# EAGLE board x (EAGLE 5.11)
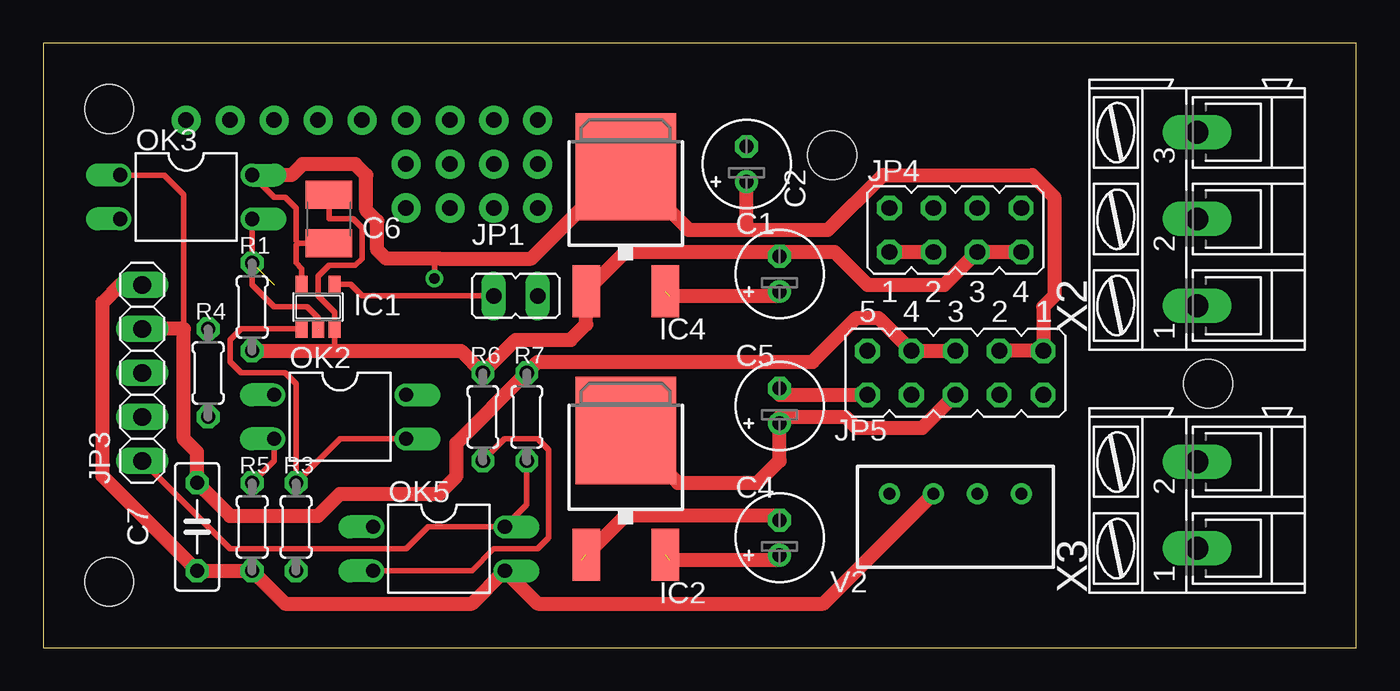
[diagram p0: board, top side]
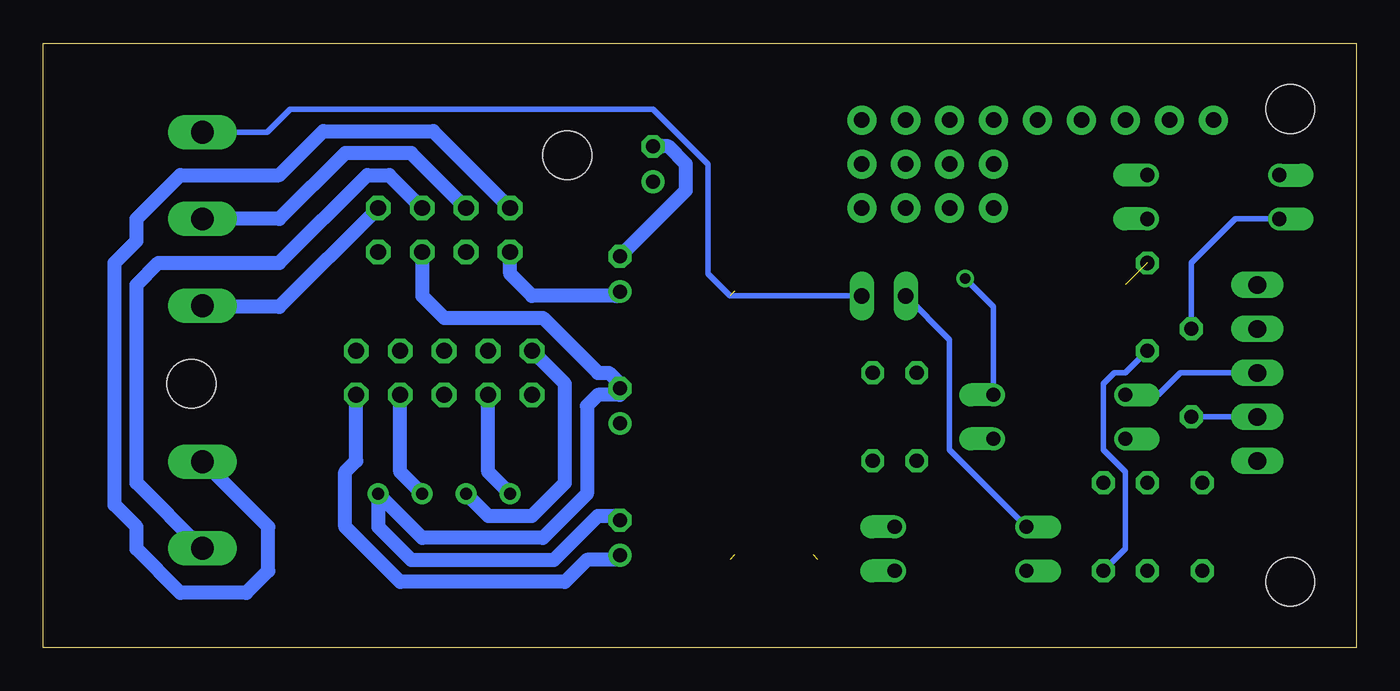
[diagram p1: board, bottom side, seen from below]

Size 75.87 x 34.91 mm. Coordinates in mm from the lower left corner, seen from the top.
Outline: 0,0 75.87,0 75.87,34.91 0,34.91 0,0
Copper layers (1*16): Top 0.035mm / dielectric 1.5mm / Bottom 0.035mm
Design rules "ipas *": minimum track width 12mil, minimum drill 24mil, track to track 10mil, track to pad 10mil, pad to pad 10mil, via to via 10mil, smd to smd 10mil, copper to edge 40mil, drill to drill 12mil, minimum pad ring 10mil, minimum via ring 8mil, stop-mask expansion 4mil, vias tented up to drill 0mil, thermal gap 10mil
Holes 2.8 mm at 3.81,3.81 45.59,28.45 67.31,15.24 3.81,31.12

## Footprints (pad centres in the part's own frame; a part is rotated, then mirrored left to right if it is on the bottom)
E2-5 = drill 0.813 pad 1.27 round: + -1.016,0 | drill 0.813 pad 1.27 octagon: - 1.016,0
C1210 = smd 1.6 x 2.7: 1 -1.4,0; 2 1.4,0
C050-025X075 = drill 0.813 octagon: 1 -2.54,0; 2 2.54,0
SOT23-5 = smd 0.69 x 0.99: 1 -0.95,-1.29; 2 0,-1.29; 3 0.95,-1.29; 4 0.95,1.3; 5 -0.95,1.3
DPACK = smd 1.6 x 3: 1 -2.28,-4.8; 3 2.28,-4.8 | smd 5.8 x 6.2: 4 0,2.38
JP1 = drill 0.914 long: 1 0,-1.27; 2 0,1.27
1X05 = drill 1.016 long: 1 -5.08,0; 2 -2.54,0; 3 0,0; 4 2.54,0; 5 5.08,0
JP4Q = drill 0.914 octagon: 1 -3.81,-1.27; 2 -3.81,1.27; 3 -1.27,-1.27; 4 -1.27,1.27; 5 1.27,-1.27; 6 1.27,1.27; 7 3.81,-1.27; 8 3.81,1.27
JP5Q = drill 0.914 octagon: 1 -5.08,-1.27; 2 -5.08,1.27; 3 -2.54,-1.27; 4 -2.54,1.27; 5 0,-1.27; 6 0,1.27; 7 2.54,-1.27; 8 2.54,1.27; 9 5.08,-1.27; 10 5.08,1.27
DIL04 = drill 0.813 offset: 1 -1.27,-3.81; 2 1.27,-3.81; 3 1.27,3.81; 4 -1.27,3.81
0204/5 = drill 0.813 octagon: 1 -2.54,0; 2 2.54,0
TME = drill 0.7 pad 1.1 round: 1 -3.81,0; 2 -1.27,0; 3 1.27,0; 4 3.81,0
AK300/3 = drill 1.321 long: 1 -5.004,0; 2 0,0; 3 5.004,0
AK300/2 = drill 1.321 long: 1 -2.515,0; 2 2.489,0

## Placement (x,y rotation side)
C1  10uF  [E2-5]  42.55,21.59 90 top
C2  10uF  [E2-5]  40.64,27.94 90 top
C4  10uF  [E2-5]  42.55,6.35 90 top
C5  10uF  [E2-5]  42.55,13.97 90 top
C6  100pF  [C1210]  16.51,24.77 90 top
C7  100pF  [C050-025X075]  8.89,6.98 90 top
IC1  74AHCT1G126DBV  [SOT23-5]  15.88,19.69 0 top
IC2  NCP1117DT33  [DPACK]  33.66,10.16 0 top
IC4  NCP1117DT50  [DPACK]  33.66,25.4 0 top
JP1  D_EN  [JP1]  27.3,20.32 90 top
JP3  DTE/DCE_TERM  [1X05]  5.71,15.87 270 top
JP4  +12_SEL  [JP4Q]  52.7,24.13 0 top
JP5  DC/DC_SEL  [JP5Q]  52.7,15.87 180 top
OK2  PC817  [DIL04]  17.14,13.33 270 top
OK3  PC817  [DIL04]  8.25,26.03 270 top
OK5  PC817  [DIL04]  22.86,5.71 270 top
R1  [0204/5]  12.07,19.69 90 top
R3  [0204/5]  14.61,6.98 90 top
R4  [0204/5]  9.53,15.87 270 top
R5  [0204/5]  12.07,6.98 90 top
R6  [0204/5]  25.4,13.33 270 top
R7  [0204/5]  27.94,13.33 90 top
V2  TME0503S  [TME]  52.7,8.89 180 top
X2  SDI12_TERM  [AK300/3]  66.67,24.77 90 top
X3  BAT  [AK300/2]  66.67,8.26 90 top

## Library data of the parts
C1 C2 C4-C7 R1 R3-R7 = rcl
IC1 = 74xx-little-us
IC2 IC4 = ipas
JP1 JP4 JP5 = jumper
JP3 = pinhead
OK2 OK3 OK5 = optocoupler; MPN: PC817X4J000F; OC_FARNELL: 9707727; OC_NEWARK: 97K7059
V2 = ipas; MPN: TME 0503S
X2 X3 = con-ptr500; OC_FARNELL: unknown; OC_NEWARK: unknown

## Nets
12V_BAT: JP4.2 X3.2
12V_SDI12: JP4.4 X2.2
+3V3: C7.2 JP3.2 JP5.5 JP5.7 OK3.1 R7.2
+5V: C2.+ C6.1 IC1.5 IC4.4 JP5.1 JP5.3 OK2.4 OK3.4
+12V: C1.+ IC4.3 JP4.1 JP4.3
DATA_SDI12: JP1.1 X2.3
GND: C1.- C2.- C4.- C5.- C6.2 IC1.3 IC2.1 IC4.1 JP4.5 JP4.7 JP5.10 R1.1 R3.1 R6.1 V2.1
GND_BAT: JP4.6 X3.1
GND_SDI12: JP4.8 X2.1
N$1: C4.+ IC2.3 JP5.2
N$2: JP5.4 V2.2
N$3: C5.+ IC2.4 JP5.6
N$4: IC1.2 OK3.3 R1.2
N$5: OK3.2 R4.1
N$6: JP5.8 V2.4
N$7: IC1.1 OK2.3 R3.2
N$8: OK2.2 R5.2
N$9: OK5.2 R6.2
N$10: IC1.4 JP1.2 OK5.1
PE: C7.1 JP3.1 JP5.9 OK5.3 R5.1 V2.3
RX: JP3.5 OK5.4 R7.1
TX: JP3.4 R4.2
TX_EN: JP3.3 OK2.1

## Tracks (layer width: path | path; a pad name or v marks a point on that pad's centre or on a via)
12V_BAT
  Bottom 0.813: X3.2 66.67,10.79 62.86,6.98 62.86,4.45 64.14,3.18 67.95,3.18 70.48,5.71 70.48,6.98 71.75,8.26 71.75,22.23 70.48,23.49 70.48,24.77 67.95,27.3 62.23,27.3 59.69,29.84 53.34,29.84 JP4.2
12V_SDI12
  Bottom 0.813: X2.2 62.23,24.77 58.42,28.58 54.61,28.58 JP4.4
+3V3
  Top 0.305: OK3.1 6.99,27.3 8.13,26.16 8.13,18.41
  Top 0.813: JP5.5 JP5.7 48.26,19.05 46.99,19.05 44.45,16.51 28.58,16.51 R7.2 23.88,11.81 23.88,9.91 22.86,8.89 17.14,8.89 15.88,7.62 10.8,7.62 C7.2 8.89,11.3 8.13,12.06 8.13,18.41 JP3.2
+5V  (via drill 0.61)
  Top 0.305: IC1.5 14.93,21.91 14.61,22.23 14.61,23.23 14.73,23.37 | 14.73,23.37 C6.1 | 14.73,23.37 14.61,23.49 14.61,25.4 13.97,26.03 13.34,26.03 OK3.4 | v22.61,21.34 22.61,22.23 22.86,22.48
  Top 0.813: JP5.3 JP5.1 57.78,19.69 58.42,20.32 58.42,26.03 57.15,27.3 48.51,27.3 45.34,24.13 40.64,24.13 | 40.64,24.13 C2.+ | 40.64,24.13 37.3,24.13 IC4.4 33.49,27.78 28.19,22.48 22.86,22.48 19.81,22.48 19.3,22.99 19.3,24.64 18.67,25.27 18.67,27.3 18.03,27.94 14.99,27.94 14.35,27.3 OK3.4
  Bottom 0.305: OK2.4 20.96,19.69 v22.61,21.34
+12V  (1 unrouted)
  Top 0.813: JP4.1 JP4.3 | 36.2,20.32 42.55,20.32 C1.+
  Bottom 0.813: C1.+ 42.8,20.32 47.62,20.32 48.9,21.59 JP4.1
DATA_SDI12
  Bottom 0.305: JP1.1 36.2,20.32 37.47,21.59 37.47,27.94 40.64,31.12 61.59,31.12 62.94,29.77 X2.3
GND  (1 unrouted)
  Top 0.305: C6.2 16.51,24.77 17.91,24.77 18.41,24.26 18.41,22.48 18.03,22.1 16.51,22.1 15.88,21.46 15.88,20.32 16.82,19.37 IC1.3 16.82,17.47 17.14,17.15
  Top 0.813: JP4.7 JP4.5 52.07,20.95 47.62,20.95 45.72,22.86 42.55,22.86 | 31.12,5.08 33.66,7.62 42.55,7.62 C4.- | JP5.10 42.55,14.6 C5.- | 42.55,22.86 C1.- | R1.1 17.14,17.15 24.13,17.15 R6.1 27.3,17.78 30.48,17.78 31.38,18.67 IC4.1 33.63,22.86 42.55,22.86
  Bottom 0.305: R3.1 13.34,5.71 13.34,10.16 14.61,11.43 14.61,15.24 13.97,15.87 13.34,15.87 R1.1
  Bottom 0.813: C4.- 42.55,7.62 43.81,7.62 46.36,5.08 54.61,5.08 56.52,6.98 V2.1 53.98,6.35 46.99,6.35 44.45,8.89 44.45,13.97 43.81,14.6 42.55,14.6 C5.- 42.55,15.24 43.18,15.87 43.81,15.87 46.99,19.05 52.7,19.05 53.98,20.32 JP4.5 | C2.- 39.75,28.96 38.73,27.94 38.73,26.42 C1.-
GND_BAT
  Bottom 0.813: X3.1 66.67,5.71 70.48,9.53 70.48,20.95 69.22,22.23 62.23,22.23 57.15,27.3 55.88,27.3 JP4.6
GND_SDI12
  Bottom 0.813: X2.1 66.67,19.69 62.23,19.69 JP4.8
N$1  (1 unrouted)
  Top 0.813: 36.2,5.08 42.55,5.08 C4.+
  Bottom 0.813: C4.+ 42.55,5.08 44.45,5.08 45.72,3.81 55.24,3.81 58.42,6.98 58.42,10.16 57.78,10.79 JP5.2
N$2
  Bottom 0.813: JP5.4 55.24,10.16 V2.2
N$3
  Top 0.813: C5.+ 42.55,13.33 46.36,13.33 46.99,12.7 50.8,12.7 JP5.6 | C5.+ 42.55,12.7 | IC2.4 36.67,9.53 41.27,9.53 42.55,10.79 C5.+
N$4  (1 unrouted)
  Top 0.305: OK3.3 R1.2 12.07,20.95 13.34,19.69 15.24,19.69 15.88,19.05 IC1.2
N$5
  Bottom 0.305: R4.1 9.53,22.23 6.99,24.77 OK3.2
N$6
  Bottom 0.813: JP5.8 50.16,10.16 V2.4
N$7
  Top 0.305: OK2.3 17.14,12.06 R3.2 14.61,15.24 13.97,15.87 11.43,15.87 10.8,16.51 10.8,17.78 11.43,18.41 14.91,18.41 IC1.1
N$8
  Top 0.305: R5.2 13.34,10.79 OK2.2
N$9
  Top 0.305: OK5.2 24.77,4.45 26.04,5.71 28.58,5.71 29.21,6.35 29.21,11.43 28.58,12.06 26.67,12.06 R6.2
N$10
  Top 0.305: IC1.4 17.75,20.98 18.41,20.32 JP1.2
  Bottom 0.305: OK5.1 23.5,11.43 23.5,17.78 JP1.2
N$11  (via drill 0.9 pad 1.68)
  other vias: 23.5,30.48 26.04,30.48 28.58,30.48 28.58,27.94 28.58,25.4 26.04,25.4 26.04,27.94 23.5,27.94 23.5,25.4 20.96,25.4 20.96,27.94 20.96,30.48 18.41,30.48 15.88,30.48 13.34,30.48 10.8,30.48 8.25,30.48
PE
  Top 0.813: V2.3 45.09,2.54 28.58,2.54 OK5.3 24.77,2.54 13.97,2.54 R5.1 C7.1 3.43,9.91 3.43,19.94 4.44,20.95 JP3.1
  Bottom 0.813: V2.3 50.16,7.62 47.62,7.62 45.72,9.53 45.72,15.24 JP5.9
RX
  Top 0.305: R7.1 27.94,8.26 OK5.4 22.23,6.98 20.96,5.71 10.8,5.71 JP3.5
TX
  Bottom 0.305: JP3.4 R4.2
TX_EN
  Bottom 0.305: OK2.1 11.43,14.6 10.16,15.87 JP3.3